# Altium PCB oscistack.PcbDoc
Units mm, origin at the board's own origin, x right, y up, seen from the top; angles counter-clockwise.
Board outline 7.88 x 9.5 mm, 2 copper layers (Top Layer, Bottom Layer); 11 components, 7 nets, 27 pads, 4 vias.
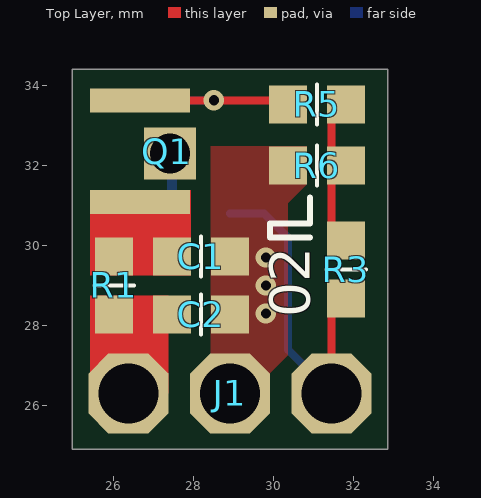
[diagram p0: Top Layer view]
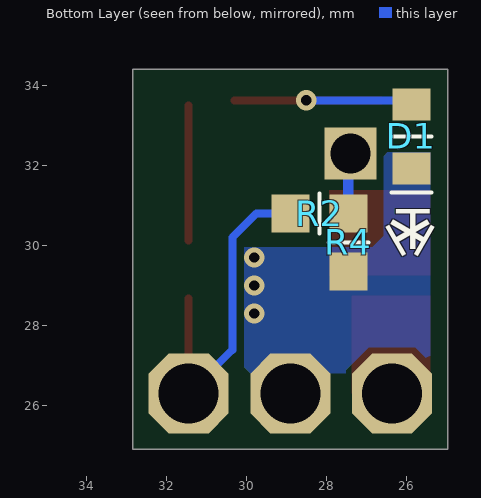
[diagram p1: Bottom Layer view, seen from below]

## Layer stack, top to bottom
Top Solder: solder mask 0.0102, Solder Resist, Dk 3.5
Top Layer: signal copper 0.0356
Dielectric 1: dielectric 0.32, FR-4, Dk 4.8
Bottom Layer: signal copper 0.0356
Bottom Solder: solder mask 0.0102, Solder Resist, Dk 3.5

## Board outline
24.96,24.9 32.84,24.9 32.84,34.4 24.96,34.4

## Design rules (kind name [scope] priority, off if disabled: settings)
BoardOutlineClearance [OnCopper] p1: gap=0.381 ignorepadtopadclearanceinfootprint=FALSE except(0: Text-OutlineEdge)
Clearance [All] p1: gap=0.16 ignorepadtopadclearanceinfootprint=FALSE
MinimumSolderMaskSliver [All] p1: minsoldermaskwidth=0.102
PolygonConnect [All vs not IsVia] p1: connectstyle=Direct reliefconductorwidth=0.254 reliefentries=4 polygonreliefangle="90 Angle" airgapwidth=0.254
RoutingVias [All] p1: holewidth=0.711 width=1.27 viastyle="Through Hole" minholewidth=0.711 minwidth=1.27 maxholewidth=0.711 maxwidth=1.27
SilkToSilkClearance [All] p1: silktosilkclearance=0.15
SilkToSolderMaskClearance [IsPad] p1: minsilkscreentomaskgap=0.102 clearancetoexposedcopper=TRUE
SolderMaskExpansion [All] p1: expansion=0.1
Width [All] p1: maxlimit=1 minlimit=0.16 preferedwidth=0.2
27 further rules are at their usual default settings.

## Components (designator, comment, footprint, x,y, rotation, side; value= is the part's Value field where it differs from the comment)
C1 "10uF" Res0603 28.175,29.725 r0 top
C2 "10uF" Res0603 28.175,28.275 r0 top
D1 "Diode0603" LED0603 25.875,32.729 r90 bottom
J1 "Connector" Header1x3 28.9,26.3 r0 top
Q1 "BJT" BJT 25.4,32.358 r90 top
R1 "4.2k" Res0603 26,29 r90 top
R2 "0" Res0603 28.175,30.8 r180 bottom
R3 "100k" Res0603 31.8,29.4 r90 top
R4 "DNP" Res0603 27.45,30.075 r270 bottom
R5 "0" Res0603 31.075,33.525 r0 top
R6 "DNP" Res0603 31.075,32 r180 top

## Footprints (in the part's own frame and the unit in brackets; to place one, negate y for a bottom-side part, rotate by r counter-clockwise, add the part's x,y. Pads: shape width x height; smd on the part's side, far side on the other; paste and mask are expansions set on the pad)
BJT [mm]
  rect 0.1x0.1 smd: B(0,-2.6)
  rect 0.6x2.5 smd: C(1.27,-1.25) E(-1.27,-1.25)
  body extent -2.6,0.5 2.6,5.83, height 4.2
Header1x3 [mm]
  oct 2x2 hole 1.5: GND(0,0) SIG(2.54,0) V+(-2.54,0)
  body extent -3.81,-1.27 3.81,1.27, height 2.54
LED0603 [mm]
  rect 0.8x0.95 smd: A(0.8,0) K(-0.8,0)
  silkscreen extent -1.4,-0.5 0,0.5, body extent -0.8,-0.4 0.8,0.4, height 0.7
Res0603 [mm]
  rect 0.95x0.95 smd: 1(-0.725,0) 2(0.725,0)
  silkscreen extent 0,-0.5 0,0.5, body extent -0.77,-0.43 0.77,0.43, height 0.45

## Part data
C1 C2: library part Cap0603
R1 R2 R3 R4 R5 R6: library part Res0603

## Free pads (board coordinates)
  rect 1.3x1.3 hole 1: 0(27.4,32.3)
  rrect10% 2.5x0.75 on Bottom Overlay: 2(27.4,28.1)
  rrect10% 2.75x6.5 on Bottom Overlay: 2(31.1,30.9)

## Via types
v1: diameter 0.508, hole 0.254, Top Layer to Bottom Layer, tented top, 4 vias

## Nets (pads, with @x,y where several pads share a name; then routed paths per layer and width w, separated by ;. In a path a pad name is that pad's centre, name@x,y a point inside that pad or via, vN(x,y) a via of type N, cw(c..) or ccw(c..) an arc to the next point about the centre after c; other vN are vias at no path point)
GND: C1.2 C2.2 D1.K J1.GND R4.2 R6.2 | length 0
  other v1: 29.8,28.3 29.8,29 29.8,29.7
NetC1_1: C1.1 Q1.E R1.2
NetD1_A: D1.A Q1.C R5.1 | length 6.2
  Top Layer w0.2: Q1.C v1(28.5,33.628) R5.1@30.3,33.628
  Bottom Layer w0.2: D1.A@26,33.628 v1(28.5,33.628)
NetJ1_SIG: J1.SIG R2.1 R3.1 | length 8.4
  Top Layer w0.2: J1.SIG R3.1@31.44,28.675
  Bottom Layer w0.2: R2.1 29.75,30.8 30.35,30.2 30.35,27.39 J1.SIG
NetJ2_T: R3.2 R5.2 R6.1 | length 3.4
  Top Layer w0.2: R3.2@31.44,30.125 R5.2@31.44,33.5
NetQ1_B: pad.0 Q1.B R2.2 R4.1 | length 1.5
  Bottom Layer w0.254: pad.0 pad.0@27.7,32 ; R4.1@27.45,31 pad.0@27.45,32.1
VCC: C2.1 J1.V+ R1.1

## Polygon pours and split planes (outlines as drawn)
GND on Bottom Layer "GND_L02_P000" (solid, pour order 0): 25.401,26.8 25.401,32.324 26.562,32.325 26.562,30.238 26.85,29.95 30.05,29.95 30.05,26.95 29.9,26.8
GND on Top Layer "GND_L01_P008" (solid, pour order 8): 29.4,26.3 30.35,27.25 30.35,31.05 30.825,31.525 30.825,32.475 28.425,32.475 28.425,26.3

## Other copper
Top Layer:
  rectangle net NetC1_1: 25.399,29.25 27.927,31.387
  rectangle net VCC: 25.401,26.3 27.365,28.748

## Silkscreen, mask and mechanical layers (free items; w line width, h text height)
Top Overlay:
  lines w0.15: 30.9,30.2 29.9,30.2 29.9,30.55 30.9,30.55 30.9,31.2
  text "02" at 30.9,28.2 h1 r90
Bottom Overlay:
  text "T" at 25.65,30.95 h1 r240
  text "T" at 26.15,30.95 h1 r120
  text "T" at 26.25,29.9 h1
Top Solder:
  rectangle: 24.725,33.228 28,34.028
  rectangle: 24.725,30.688 28,31.488
Mechanical 1:
  the board outline again, w0.1